# EAGLE board Versie 2 (EAGLE 7.3.0)
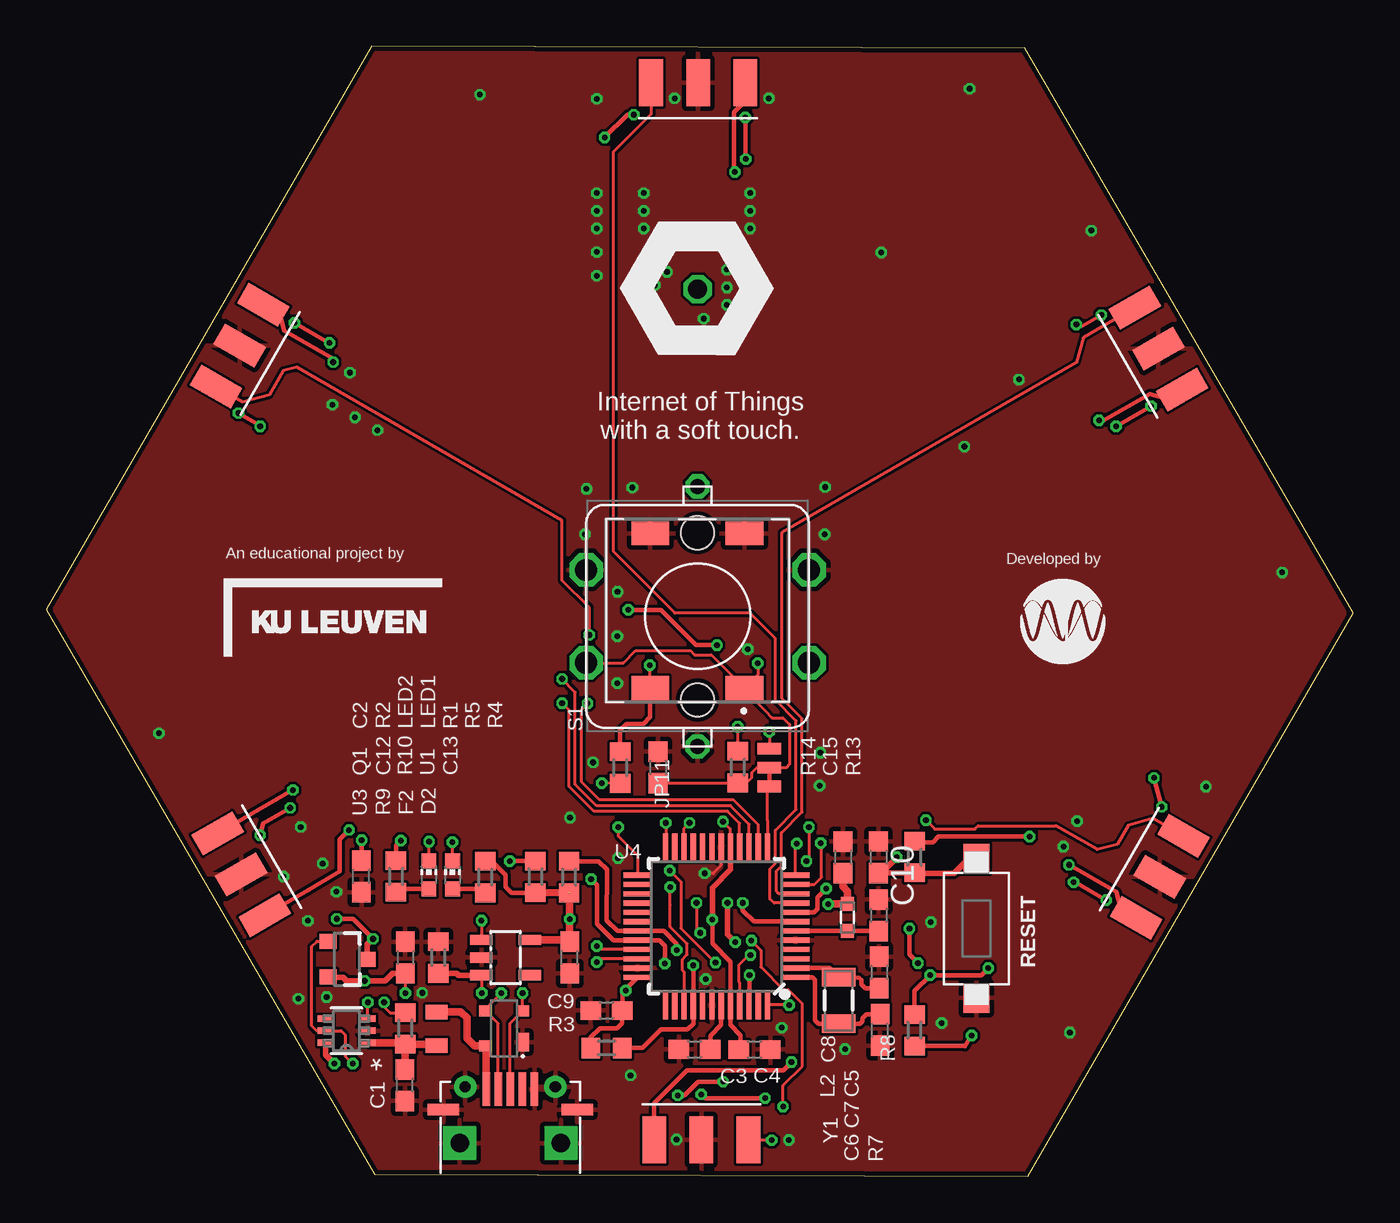
[diagram p0: board, top side]
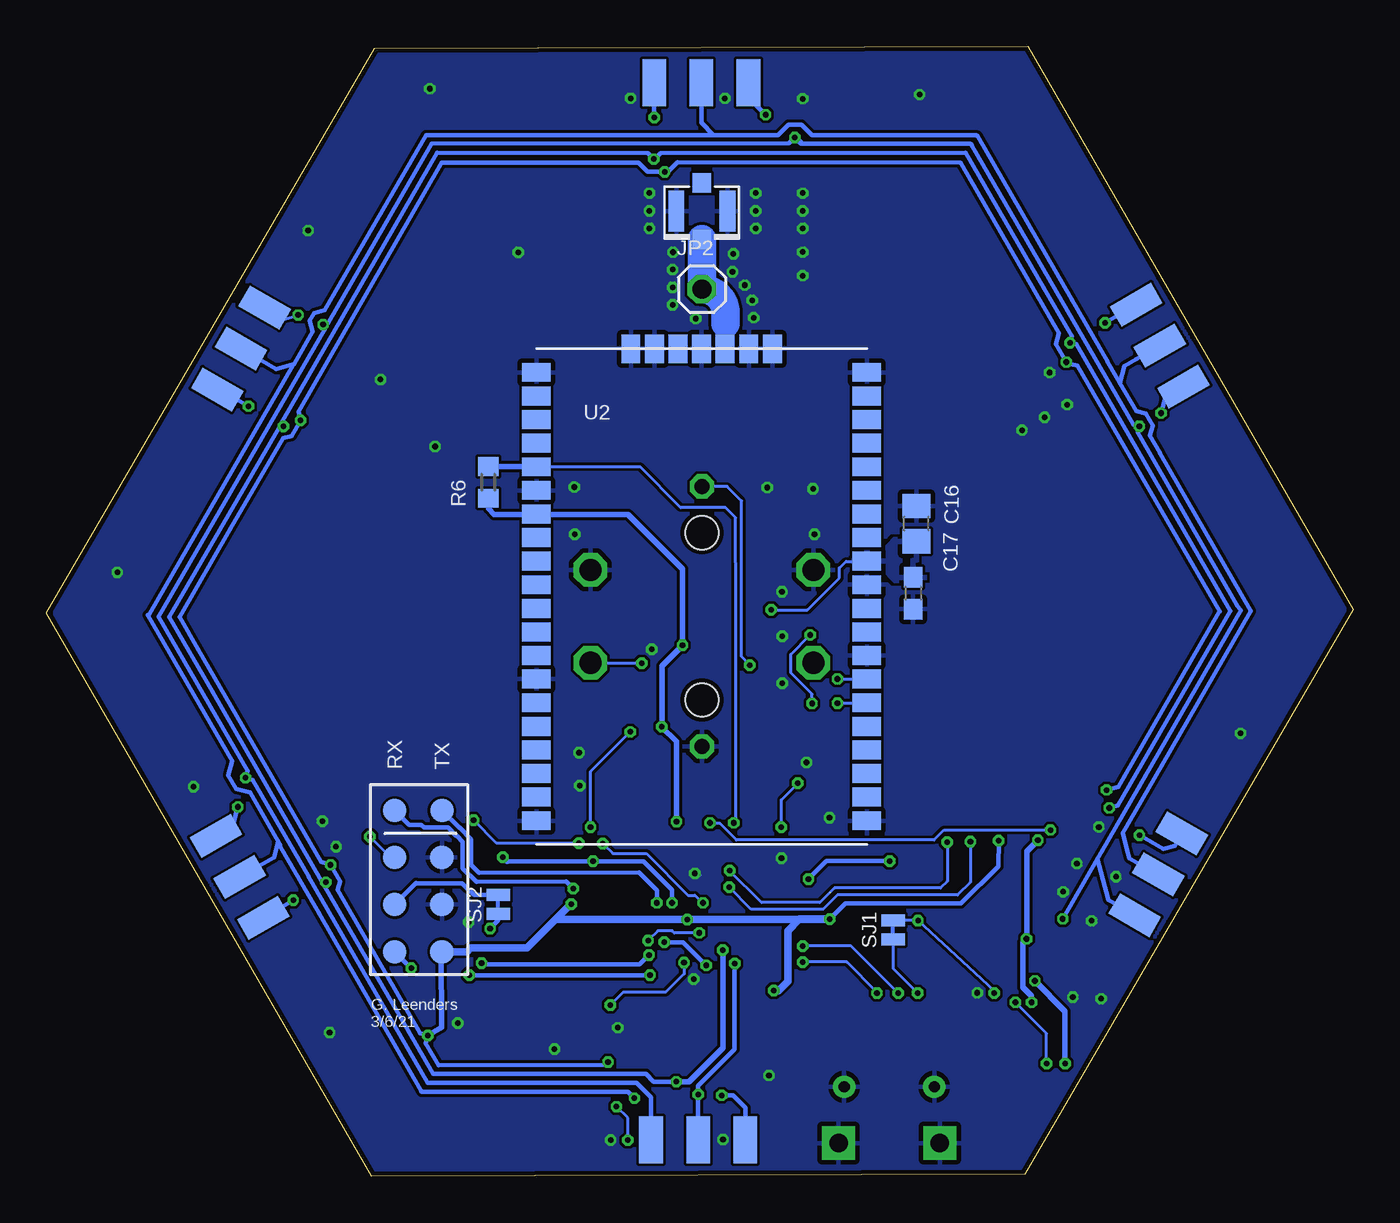
[diagram p1: board, bottom side, seen from below]

Size 70.33 x 60.81 mm. Coordinates in mm from the lower left corner, seen from the top.
Outline: 0,30.5 17.66,0.09 52.83,0 70.33,30.31 52.66,60.72 17.5,60.81 0,30.5
Copper layers (1*16): Top 0.035mm / dielectric 1.5mm / Bottom 0.035mm
Design rules "SeeedStudio_2layer_DRU_no_angle_20140221": minimum track width 6mil, minimum drill 12mil, track to track 6mil, track to pad 6mil, pad to pad 6mil, via to via 6mil, smd to smd 0mil, copper to edge 10mil, drill to drill 10mil, minimum pad ring 10mil, minimum via ring 6mil, stop-mask expansion 2mil, vias tented up to drill 100mil, thermal gap 10mil

## Footprints (pad centres in the part's own frame; a part is rotated, then mirrored left to right if it is on the bottom)
C0603 = smd 1.1 x 1: 1 -0.85,0; 2 0.85,0
C0805 = smd 1.3 x 1.5: 1 -0.95,0; 2 0.95,0
SOT143B = smd 1 x 0.7: 1 -0.75,-1 | smd 0.6 x 0.7: 2 0.95,-1; 3 0.95,1; 4 -0.95,1
0805 = smd 0.8 x 1.2: 1 -0.9,0; 2 0.9,0
U.FL = smd 2.2 x 0.85: P$1 0,1.375; P$2 0,-1.375 | smd 1.05 x 1: P$3 1.525,0; P$4 -1.525,0
1X01 = drill 1.016 octagon: 1 0,0
2X03 = smd 1.27 x 2.54: 1 -2.54,1.905; 2 0,1.905; 3 2.54,1.905 | smd 1.27 x 2.54 bottom: 4 -2.54,1.905; 5 0,1.905; 6 2.54,1.905
SMT-JUMPER_3_1-NC_TRACE_SILK = smd 0.635 x 1.27: 1 -1.016,0; 2 0,0; 3 1.016,0
WE-CBA_0603(W=2.2) = smd 0.75 x 0.7: 1 -0.725,0; 2 0.725,0
CHIP-LED0603 = smd 0.8 x 0.8: A 0,-0.75; C 0,0.75
SOT23-3 = smd 0.8 x 0.9: 1 -0.95,-1; 2 0.95,-1; 3 0,1.1
R0603 = smd 1 x 1.1: 1 -0.85,0; 2 0.85,0
KSS-2EG4430 = smd 1.6 x 1.4: 1 -3.75,0; 2 3.75,0
30062101 = smd 2.025 x 1.275: 1 2.537,-4.162; 2 -2.538,4.162; 3 -2.538,-4.162; 4 2.537,4.162
PAD-JUMPER-2-NC_BY_TRACE_NO_SILK = smd 0.635 x 1.27: 1 -0.508,0; 2 0.508,0
B1,27 = smd 1.27 x 1.27: TP 0,0
SOT25 = smd 0.55 x 1.2: 1 -0.95,-1.3; 2 0,-1.3; 3 0.95,-1.3; 4 0.95,1.3; 5 -0.95,1.3
RN2483 = smd 1.524 x 1.016: GND 17.78,1.27; GND1 17.78,10.16; GND2 17.78,13.97; GND3 17.78,25.4; GND9 0,25.4; GND10 0,19.05; GND11 0,8.89; GND12 0,1.27; GPIO0 0,16.51; GPIO1 0,15.24; GPIO2 0,13.97; GPIO3 0,12.7; GPIO4 0,11.43; GPIO5 0,10.16; GPIO6 0,6.35; GPIO7 0,5.08; GPIO8 0,3.81; GPIO9 0,2.54; GPIO10 17.78,17.78; GPIO11 17.78,16.51; GPIO12 17.78,12.7; GPIO13 17.78,11.43; P$1 0,21.59; P$2 0,22.86; P$3 0,24.13; P$4 17.78,24.13; P$5 17.78,22.86; P$6 17.78,21.59; P$7 17.78,20.32; P$8 17.78,19.05; P$9 17.78,6.35; P$10 17.78,5.08; P$11 0,7.62; RESET° 0,20.32; UART_CTS 17.78,3.81; UART_RTS 17.78,2.54; UART_RX 17.78,8.89; UART_TX 17.78,7.62; VDD 17.78,15.24; VDD2 0,17.78 | smd 1.016 x 1.524: GND4 12.7,26.67; GND5 11.43,26.67; GND6 8.89,26.67; GND7 6.35,26.67; GND8 5.08,26.67; RFH 10.16,26.67; RFL 7.62,26.67
DCK6_TEX = smd 0.851 x 0.356: 1 -1.137,0.65; 2 -1.137,0; 3 -1.137,-0.65; 4 1.137,-0.65; 5 1.137,0; 6 1.137,0.65
TQFP-48 = smd 1.5 x 0.28: 1 -4.25,2.75; 2 -4.25,2.25; 3 -4.25,1.75; 4 -4.25,1.25; 5 -4.25,0.75; 6 -4.25,0.25; 7 -4.25,-0.25; 8 -4.25,-0.75; 9 -4.25,-1.25; 10 -4.25,-1.75; 11 -4.25,-2.25; 12 -4.25,-2.75; 25 4.25,-2.75; 26 4.25,-2.25; 27 4.25,-1.75; 28 4.25,-1.25; 29 4.25,-0.75; 30 4.25,-0.25; 31 4.25,0.25; 32 4.25,0.75; 33 4.25,1.25; 34 4.25,1.75; 35 4.25,2.25; 36 4.25,2.75 | smd 0.28 x 1.5: 13 -2.75,-4.25; 14 -2.25,-4.25; 15 -1.75,-4.25; 16 -1.25,-4.25; 17 -0.75,-4.25; 18 -0.25,-4.25; 19 0.25,-4.25; 20 0.75,-4.25; 21 1.25,-4.25; 22 1.75,-4.25; 23 2.25,-4.25; 24 2.75,-4.25; 37 2.75,4.25; 38 2.25,4.25; 39 1.75,4.25; 40 1.25,4.25; 41 0.75,4.25; 42 0.25,4.25; 43 -0.25,4.25; 44 -0.75,4.25; 45 -1.25,4.25; 46 -1.75,4.25; 47 -2.25,4.25; 48 -2.75,4.25
LS1201 = drill 1.2 octagon: C1 0,5; C2 12,5; C3 0,0; C4 12,0 | drill 0.8 octagon: L1 6,9.5; L2 6,-4.5 | hole 1.8: 6,-2; 6,7
FCI-10103594-0001LF = smd 0.4 x 1.8: 1 -1.3,4.6; 2 -0.65,4.6; 3 0,4.6; 4 0.65,4.6; 5@1 1.3,4.6 | drill 0.6 pad 1.2: 5@2 -2.425,4.73; 5@3 2.425,4.73 | drill 1 pad 1.778 square: 5@4 -2.725,1.7; 5@5 2.725,1.7 | smd 1.7 x 0.635: 5@6 -3.6,3.5; 5@7 3.6,3.5
CRYSTAL-SMD-3.2X1.5MM = smd 1 x 1.8: P$1 -1.25,0; P$2 1.25,0

## Placement (x,y rotation side)
C1  100n  [C0603]  19.3,4.9 90 top
C2  100n  [C0603]  16.95,16.14 90 top
C3  1u  [C0603]  34.88,6.83 0 top
C4  100n  [C0603]  38.11,6.82 180 top
C5  100n  [C0603]  44.79,14.04 270 top
C6  15p  [C0603]  44.87,7.87 90 top
C7  15p  [C0603]  44.82,10.97 270 top
C8  100n  [C0603]  42.87,17.17 270 top
C9  100n  [C0603]  30.15,8.92 0 top
C10  100n  [C0603]  44.78,17.17 270 top
C12  100n  [C0603]  19.31,11.77 270 top
C13  100n  [C0603]  28.17,11.77 90 top
C15  100n  [C0603]  32.92,22.01 270 top
C16  10u  [C0805]  23.51,35.12 90 bottom
C17  100n  [C0603]  23.68,31.38 270 bottom
D2  PRTR5V0U2X,215  [SOT143B]  24.64,7.96 90 top
F2  PPTC_6V500MA  [0805]  21,7.93 270 top
J1  U.FL  [U.FL]  35.05,51.95 270 bottom
JP2  [1X01]  35.05,47.75 0 bottom
JP3  [2X03]  35.08,60.76 180 top
JP4  [2X03]  61.51,45.5 120 top
JP5  [2X03]  61.58,15.16 60 top
JP6  [2X03]  35.25,0.05 0 top
JP7  [2X03]  8.83,15.3 300 top
JP8  [2X03]  8.75,45.66 240 top
JP11  [SMT-JUMPER_3_1-NC_TRACE_SILK]  38.91,21.99 270 top
L2  [WE-CBA_0603(W=2.2)]  43.13,13.93 90 top
LED1  [CHIP-LED0603]  21.85,16.21 0 top
LED2  [CHIP-LED0603]  20.58,16.21 0 top
Q1  [SOT23-3]  16.16,11.68 270 top
R1  470  [R0603]  23.62,16.1 90 top
R2  470  [R0603]  18.82,16.14 90 top
R3  10k  [R0603]  30.15,6.9 180 top
R4  10k  [R0603]  28.13,16.1 270 top
R5  10k  [R0603]  26.32,16.11 270 top
R6  10k  [R0603]  46.54,37.35 270 bottom
R7  10k  [R0603]  46.72,7.86 270 top
R8  330  [R0603]  46.72,17.18 90 top
R9  10k  [R0603]  19.31,7.96 90 top
R10  10k  [R0603]  21.09,11.77 270 top
R13  10k  [R0603]  37.21,22.02 90 top
R14  10k  [R0603]  30.88,21.99 90 top
RESET  KSS-2EG4430  [KSS-2EG4430]  50.05,13.34 270 top
S1  3006.2100  [30062101]  35.04,30.44 0 top
SJ1  [PAD-JUMPER-2-NC_BY_TRACE_NO_SILK]  24.76,13.25 90 bottom
SJ2  [PAD-JUMPER-2-NC_BY_TRACE_NO_SILK]  46.01,14.63 90 bottom
TP1  TPB1,27  [B1,27]  49.05,12.09 0 bottom
TP2  TPB1,27  [B1,27]  49.05,14.63 0 bottom
TP3  TPB1,27  [B1,27]  49.05,17.17 0 bottom
TP4  TPB1,27  [B1,27]  51.59,12.09 0 bottom
TP5  TPB1,27  [B1,27]  51.59,14.63 0 bottom
TP6  TPB1,27  [B1,27]  51.59,17.17 0 bottom
TP7  TPB1,27  [B1,27]  49.04,19.69 0 bottom
TP8  TPB1,27  [B1,27]  51.58,19.69 0 bottom
U1  LP2985AIM5-3.3  [SOT25]  24.71,11.77 270 top
U2  RN2483  [RN2483]  43.96,17.87 0 bottom
U3  LM66100DCKR  [DCK6_TEX]  16.15,7.83 180 top
U4  ATSAMD21G-A  [TQFP-48]  36.07,13.45 180 top
U$1  LS1201  [LS1201]  29.04,27.63 0 top
USB1  USB-RECEPTABLE  [FCI-10103594-0001LF]  24.97,0.08 0 top
Y1  32.768kHz  [CRYSTAL-SMD-3.2X1.5MM]  42.64,9.46 270 top

## Library data of the parts
C1-C10 C12 C13 C15-C17 R1-R10 R13 R14 = rcl
D2 = PRTR5V0U2X_215; AVAILABILITY: Good; DESCRIPTION: Clamp Ipp Tvs Diode Surface Mount SOT-143B; MF: Nexperia USA Inc.; MP: PRTR5V0U2X,215; PACKAGE: None; PRICE: None; PURCHASE-URL: https://pricing.snapeda.com/search/part/PRTR5V0U2X,215/?ref=eda
F2 = SparkFun-Fuses
J1 = SparkFun-Connectors; PROD_ID: CONN-09193
JP2 = pinhead
JP3-JP8 = pinhead_edge
JP11 = SparkFun-Jumpers
L2 = EagleLibrary_Wuerth_Elektronik_eiSos_rev16a
LED1 LED2 = led
Q1 = SparkFun-DiscreteSemi; PROD_ID: TRANS-11308
RESET = buttons
S1 = SamacSys_Parts; DESCRIPTION: Tactile Switches TACTILE; HEIGHT: 4.15mm; MANUFACTURER_NAME: MARQUARDT; MANUFACTURER_PART_NUMBER: 3006.2100; MOUSER_PART_NUMBER: 979-3006.2100
SJ1 SJ2 = SparkFun-Passives
TP1-TP8 = testpad
U1 = LP2985
U2 = RN2483
U3 = LM66100; BUILT_BY: EMA_Jessica; COPYRIGHT: Copyright (C) 2018 Accelerated Designs. All rights reserved; MANUFACTURER_PART_NUMBER: LM66100DCKR; SOURCELIBRARY: TI_2019-12-20; VENDOR: Texas Instruments
U4 = samd21-temp; PROD_ID: IC-13064
U$1 = button
USB1 = daspilker
Y1 = samd21-temp; PROD_ID: XTAL-13062

## Nets
+3V3: C4.2 C8.2 C9.2 C13.2 C16.1 C17.1 JP3.1 JP4.1 JP5.1 JP6.1 JP7.1 JP8.1 L2.2 R1.2 R2.2 R3.2 R4.2 R5.2 R6.2 R7.2 R13.2 TP1.TP U1.5 U2.VDD U2.VDD2 U4.17 U4.36 U4.44
BUTTON: JP11.3 U4.13
DEBUGLED: R14.1 U4.25
DEBUGRX: TP8.TP U4.8
DEBUGTX: TP7.TP U4.7
EXINT4: JP3.3 U4.9
EXINT5: JP4.3 U4.10
EXINT6: JP5.3 U4.11
EXINT7: JP6.3 U4.12
EXINT8: JP7.3 U4.22
EXINT9: JP8.3 U4.14
GND: C1.1 C2.1 C3.1 C4.1 C5.1 C6.1 C7.1 C8.1 C9.1 C10.1 C12.1 C13.1 C15.1 C16.2 C17.2 D2.1 J1.P$1 J1.P$2 JP3.2 JP4.2 JP5.2 JP6.2 JP7.2 JP8.2 R10.1 RESET.2 S1.2 S1.4 TP2.TP TP3.TP U1.2 U2.GND U2.GND1 U2.GND2 U2.GND3 U2.GND4 U2.GND5 U2.GND6 U2.GND7 U2.GND8 U2.GND9 U2.GND10 U2.GND11 U2.GND12 U3.2 U4.5 U4.18 U4.35 U4.42 U$1.C1 U$1.C2 U$1.L2 USB1.5@1 USB1.5@2 USB1.5@3 USB1.5@4 USB1.5@5 USB1.5@6 USB1.5@7
N$1: LED1.A R1.1
N$2: LED2.A R2.1
N$3: SJ2.2 TP5.TP
N$5: C6.2 U4.1 Y1.P$2
N$6: C7.2 U4.2 Y1.P$1
N$7: C5.2 L2.1 U4.6
N$8: U2.UART_CTS
N$9: U2.UART_RTS
N$10: J1.P$3 JP2.1 U2.RFH
N$14: Q1.1 R9.2 U3.5
N$15: R8.2 TP6.TP
ONOFF: R10.2 SJ1.1 U1.3
PB22: U4.37
PB23: U4.38
RESETRN2483: R6.1 U2.RESET° U4.24
RXLED: LED1.C U4.48
RXSAMD: U2.UART_TX U4.16
SAMDRESET: C10.2 JP11.1 R3.1 R8.1 RESET.1 U4.40
SCL: JP3.5 JP4.5 JP5.5 JP6.5 JP7.5 JP8.5 R5.1 U4.32
SDA: JP3.4 JP4.4 JP5.4 JP6.4 JP7.4 JP8.4 R4.1 U4.31
SPI_MOSI: U4.19
SPI_SCK: U4.20
SWCLK: SJ2.1 U4.45
SWDIO: R7.1 TP4.TP U4.46
TACTILE_BUTTON: C15.2 JP11.2 R13.1 S1.1 U$1.C3 U$1.C4
TACTILE_LED: R14.2 S1.3 U$1.L1
TARGET_USB_N: D2.3 U4.33 USB1.2
TARGET_USB_P: D2.2 U4.34 USB1.3
TXLED: LED2.C U4.39
TXSAMD: U2.UART_RX U4.15
USB_HOST_EN: U4.41
VBAT: C2.2 JP3.6 JP4.6 JP5.6 JP6.6 JP7.6 JP8.6 Q1.3 U3.3
VDDCORE: C3.2 U4.43
VIN: C12.2 Q1.2 SJ1.2 U1.1 U3.6
VINUSB: D2.4 F2.1 USB1.1
VUSB: C1.2 F2.2 R9.1 U3.1

## Tracks (layer width: path | path; a pad name or v marks a point on that pad's centre or on a via)
+3V3  (via drill 0.3)  (1 unrouted)
  Top 0.152: R13.2 v37.21,24.19 v37.2,24.2 | U4.17 36.8,17.72 36.8,18.7 v36.41,19.08
  Top 0.254: 37.28,6.84 C4.2 37.36,6.92 37.36,7.59 36.82,8.14 U4.44 36.83,9.21 36.83,11.54 35.84,12.53 v35.84,13.81 | 31,9.88 C9.2 30.99,8.91 30.99,8.23 30.72,7.96 29.79,7.96 29.3,7.46 R3.2 | 31,9.88 U4.36 | 31,9.88 31.08,9.88 v31.19,9.99 | 36.83,17.69 U4.17 | R1.2 23.98,16.95 24.71,16.21 24.71,15.58 25.03,15.26 R5.2 | R2.2 18.82,17.8 v19.07,18.06 | R7.2 49.41,7.01 49.45,7 v49.79,7.57 49.79,7.58 | JP6.1 32.71,3.94 34.47,5.7 39.66,5.7 v40.1,6.14 | v13.26,20.79 JP7.1 | JP8.1 12.57,46.38 12.8,45.51 15.37,44.03 v15.43,43.82 | JP3.1 37.62,57.88 37,57.26 37,54.11 v37.06,54.06 | v31.32,30.48 33.08,30.48 34.97,28.59 v36.08,28.59 v36.09,28.58 | JP4.1 60.29,41.86 59.38,42.11 56.83,40.63 v56.65,40.68 | JP5.1 57.84,14.38 57.59,15.3 55.06,16.76 v55.03,16.76
  Top 0.305: 36.83,17.69 36.83,16.52 35.84,15.53 v35.84,13.81
  Top 0.406: U1.5 28.07,12.72 C13.2 v28.17,13.84 28.15,13.85 28.15,15.22 R4.2 | 28.14,15.27 R5.2 | v42.09,14.65 L2.2 43.13,15.34 42.87,15.59 C8.2
  Bottom 0.152: v31.32,30.48 29.37,30.48 27.65,32.2 27.65,32.74 27.29,33.09 26.19,33.09 U2.VDD
  Bottom 0.254: v15.43,43.82 15.43,43.78 14.84,43.62 7.18,30.4 7.19,30.4 12.31,21.53 12.64,20.96 v13.26,20.79 | v40.1,6.14 40.24,6 49.23,5.98 49.91,7.15 v49.79,7.57 50.21,7.68 50.36,7.94 54.66,15.42 54.53,15.88 v55.03,16.76 55.08,16.79 55.55,16.91 62.15,28.35 63.16,30.1 63.16,30.11 60.43,34.83 57.6,39.73 57.13,39.84 v56.65,40.68 56.64,40.7 56.76,41.16 49.17,54.37 49.05,54.56 38.47,54.56 37.97,54.06 v37.06,54.06 36.88,54.06 36.37,54.57 21.13,54.56 21.11,54.53 15.82,45.38 15.98,44.78 v15.43,43.82 | v19.07,18.06 19.1,16.68 21.1,14.68 27.33,14.68 v28.17,13.84 | 49.08,12.08 TP1.TP 49.06,12.07 | v15.43,43.82
  Bottom 0.305: 26.26,33.02 U2.VDD | R6.2 46.54,35.92 46.24,35.63 43.98,35.63 U2.VDD2 43.93,35.63 39.03,35.63 36.09,32.69 v36.09,28.58 37.2,27.47 v37.2,24.2 | 23.68,34 C16.1 | 49.08,12.08 49.07,8 v49.79,7.57 | v36.41,19.08 36.41,23.4 v37.21,24.19
  Bottom 0.406: v31.19,9.99 30.94,9.99 30.43,10.5 30.43,13.2 29.79,13.84 v28.17,13.84 28.19,13.81 v35.84,13.81 42.94,13.81 | v42.09,14.65 42.1,14.65 42.94,13.81 | 42.94,13.81 44.12,12.63 | 49.05,12.11 TP1.TP 47.69,12.08 47.49,12.28 44.47,12.28 44.12,12.63 | 44.12,12.63
  pour Bottom: 24.65,32.07 23.07,32.07 23.07,34.61 24.34,34.61 25.29,33.66 26.88,33.66 26.88,32.7 25.29,32.7
BUTTON
  Top 0.152: U4.13 38.8,19.14 38.8,20.87 JP11.3
DEBUGLED  (via drill 0.3)
  Top 0.152: R14.1 30.78,21.17 v29.89,21.15 | v30.78,18.79 30.78,18.3 31.82,17.26 U4.25
  Bottom 0.152: v30.78,18.79 30.78,20.26 v29.89,21.15
DEBUGRX  (via drill 0.3)
  Top 0.254: U4.8 41.31,14.2 41.49,14.39 41.49,15 v41.98,15.48
  Bottom 0.254: v41.98,15.48 42.36,15.86 47.18,15.84 47.92,16.58 47.92,18 48.23,18.3 48.28,18.33 48.71,18.76 50,18.76 50.16,18.91 50.8,18.91 TP8.TP
DEBUGTX  (via drill 0.3)
  Top 0.254: U4.7 38.08,13.71 37.47,14.32 v37.47,14.71
  Bottom 0.254: TP7.TP 48.12,18.76 48.07,18.73 47.46,18.13 47.46,16.75 47.03,16.32 38.42,16.35 37.47,15.39 v37.47,14.71
EXINT4
  Top 0.152: U4.9 39.17,14.7 38.94,14.92 38.94,16.54 39.23,16.83 39.23,18.62 40.35,19.73 40.35,24.51 39.23,25.62 39.23,28.95 37.87,30.31 33.83,30.31 30.53,33.61 30.53,55.15 32.56,57.19 32.56,58.84 JP3.3
EXINT5
  Top 0.152: U4.10 39.41,15.2 39.29,15.33 39.29,16.42 39.56,16.7 39.56,18.49 40.68,19.6 40.68,24.63 39.59,25.73 39.59,34.65 39.59,34.64 39.58,34.64 55.44,43.8 55.8,45.14 JP4.3
EXINT6  (via drill 0.3)
  Top 0.152: U4.11 41.33,15.7 41.72,16.09 41.72,17.87 v41.67,17.92 | v47.34,19.17 47.82,18.68 49.98,18.68 50.16,18.86 54.31,18.86 54.33,18.87 56.56,17.58 57.64,17.87 58.23,18.89 59.56,19.25 JP5.3
  Bottom 0.152: v41.67,17.92 46.09,17.92 v47.34,19.17
EXINT7  (via drill 0.3)
  Top 0.152: U4.12 40.32,17.78 v40.38,17.9 | v34.99,14.71 34.99,13.3 v35.2,13.1 | JP6.3 39.02,1.95 v39.04,1.94 | v37.94,12.68 37.94,12.66 38.45,12.15 38.45,11.26 39.67,10.04 39.93,10.04 40.69,9.28 40.69,5.92 39.65,4.88 v39.65,3.74
  Bottom 0.152: v40.38,17.9 39.84,17.36 38.04,17.36 35.81,15.13 35.42,15.13 v34.99,14.71 | v35.2,13.1 36.53,13.1 36.65,13.21 37.41,13.21 v37.94,12.68 | v39.04,1.94 39.04,3.13 v39.65,3.74
EXINT8  (via drill 0.3)
  Top 0.152: U4.22 34.32,18.72 v34.61,19.01
  Top 0.254: JP7.3 14.12,15.42 15.79,16.4 15.79,18.13 v16.29,18.63 15.99,18.33
  Bottom 0.152: v34.61,19.01 34.1,19.01 33.19,18.1 22.55,18.1 22.01,18.63 v16.29,18.63
EXINT9  (via drill 0.3)
  Top 0.152: U4.14 38.32,18.92 36.97,20.26 29.76,20.26 28.79,21.22 28.79,25.12 v29.12,25.45 | JP8.3 10.56,41.68 11.98,42.06 12.73,43.35 13.49,43.56 27.74,35.32 27.75,35.23 27.75,32.08 29.22,30.6 v29.22,29.13
  Bottom 0.152: v29.12,25.45 29.12,25.95 30.26,27.1 30.26,28.09 v29.22,29.13
GND  (via drill 0.3)
  Top 0.152: U4.18 36.32,16.73 35.88,16.3 v35.42,16.3
  Bottom 0.152: v35.42,16.3 35.23,16.3 35.13,16.19
  other vias: 6.05,23.84 23.34,58.22 15.08,9.64 20.22,9.87 13.56,9.55 49.69,58.54 66.52,32.5 55.09,7.74 35.49,10.61 39.58,7.99 31.44,5.42 30.76,17.11 28.19,19.3 29.42,22.27 30.72,26.53 37.75,28.36 41.61,21.02 56.24,50.9 52.35,42.88 44.93,49.73 32.26,46.21 32.33,47.15 32.74,47.96 33.4,48.67 35.38,46.16 33.35,49.64 36.6,49.74 36.63,48.8 36.63,47.85 36.63,46.9 37.87,51.01 37.87,51.96 37.87,52.92 32.16,52.92 32.16,51.96 32.16,51.01 42.98,6.85 39.96,1.94 33.91,1.97 13.68,18.8 15.6,15.31 12.76,16.13 14.08,13.75 16.33,43.25 15.39,41.53 16.61,40.85 17.82,40.15 29.62,52.92 29.62,51.96 29.62,51.01 29.62,49.74 29.62,48.47 29.62,58 33.81,58.02 38.89,58.02 54.74,17.74 55.47,19.11 62.41,20.97 48.19,8.24 47.6,13.68 14.87,16.83 30.72,29.07 30.74,31.45 28.99,34.55 31.53,37.07 29.07,36.99 41.89,34.55 41.92,37.09 49.41,39.28 41.66,22.79
  pour Top (rank 6): 95.59,46.2 24.1,87.48 -21.62,8.29 49.87,-32.99
  pour Bottom (rank 6): 36.67,-25.37 -21.62,8.29 24.1,87.48 95.59,46.2 49.87,-32.99
N$1
  Top 0.254: LED1.A 23.41,15.46 R1.1
N$2
  Top 0.254: LED2.A 19,15.46 R2.1
N$3
  Bottom 0.254: 50.44,15.79 50.44,15.78 | 50.44,15.78 TP5.TP | 50.44,15.78 50.42,15.76 47.95,15.76 47.32,15.14 SJ2.2
N$5
  Top 0.254: C6.2 44.13,8.72 43.91,8.5 43.91,8.33 43.79,8.2 Y1.P$2 41.55,8.2 41.37,8.38 41.37,10.56 41.23,10.7 U4.1
N$6
  Top 0.254: U4.2 42.15,11.2 Y1.P$1 42.66,10.69 43.74,10.69 43.86,10.56 43.86,10.33 44.08,10.12 C7.2
N$7
  Top 0.254: U4.6 42.54,13.2 L2.1 44.2,13.2 C5.2
N$10
  Bottom 1.016: U2.RFH 33.78,44.55 33.78,45.64 33.79,45.9
  Bottom 1.54: J1.P$3 JP2.1 arc90 33.79,46.48 33.79,45.9
N$14  (via drill 0.3)
  Top 0.152: Q1.1 15.15,12.65 14.56,12.65 14.28,12.37 14.28,8.09 14.54,7.83 U3.5 15.86,7.83 16.09,7.6 16.09,6.46 v16.49,6.05 | R9.2 18.5,8.8 18.17,9.13 v18.17,9.36
  Bottom 0.152: v16.49,6.05 16.49,7.68 v18.17,9.36
N$15  (via drill 0.3)
  Top 0.254: R8.2 46.97,17.98 47.72,17.98 48.02,18.28 v52.92,18.28
  Bottom 0.152: TP6.TP 51.81,17.17 v52.92,18.28
  Bottom 0.254: v52.92,18.28 53.01,18.28
ONOFF  (via drill 0.3)
  Top 0.152: v23.44,9.86 23.44,10.79 U1.3
  Top 0.305: R10.2 22.07,10.92 22.17,10.82 U1.3
  Bottom 0.152: SJ1.1 24.76,11.18 v23.44,9.86
RESETRN2483  (via drill 0.3)
  Top 0.152: v33.34,19.01 33.34,17.73 U4.24
  Bottom 0.152: U2.RESET° 38.39,38.19 36.19,35.99 33.77,35.99 33.23,35.45 33.23,33.02 33.23,19.13 v33.34,19.01
  Bottom 0.305: U2.RESET° R6.1
RXLED  (via drill 0.3)
  Top 0.152: LED1.C 21.85,17.97 v21.84,17.98 | U4.48 38.82,9.21 v39.97,9.21 | 33.56,16.44 v33.55,16.44 33.56,16.44 | 33.56,16.44 34.15,15.85 34.15,13.35 v36.01,11.5
  Bottom 0.152: v21.84,17.98 21.84,15.87 22.2,15.52 27.91,15.52 28.7,14.73 31.84,14.73 v33.55,16.44 | v36.01,11.5 36.01,10.89 37,9.9 39.29,9.9 v39.97,9.21
RXSAMD  (via drill 0.3)
  Top 0.152: U4.16 37.32,18.99 36.67,19.64 29.47,19.64 28.13,20.97 28.13,25.08 v27.75,25.47
  Bottom 0.152: v27.75,25.47 26.2,25.47 U2.UART_TX
SAMDRESET  (via drill 0.3)
  Top 0.152: v38.9,23.92 v38.91,23.91 JP11.1 | v41.04,18.79 41.04,17.08 v40.91,16.96
  Top 0.254: R3.1 32.08,6.9 33.07,7.9 34.52,7.9 34.82,8.2 U4.40 v34.82,11.35
  Top 0.305: RESET.1 50.05,17.41 49.98,17.49 49.98,17.42 48.84,16.29 47.35,16.29 47.34,16.3 R8.1 44.93,16.33 v45.77,17.17 | v36.66,14.71 36.66,13.01 v37.07,12.6
  Top 0.406: C10.2 44.79,16.33 44.93,16.33
  Bottom 0.152: v41.04,18.79 41.04,21.78 v38.9,23.92
  Bottom 0.254: v34.82,11.35 36.07,12.59 36.71,12.59 v37.07,12.6 | 45.55,16.96 41.44,16.96 v40.91,16.96 38.19,16.96 36.66,15.42 v36.66,14.71
  Bottom 0.305: 45.55,16.96 v45.77,17.17
SCL  (via drill 0.3)
  Top 0.254: R5.1 v24.94,16.96 | v29.31,16 29.64,15.67 29.64,13.58 30.53,12.7 U4.32 | U4.32 | U4.32 32.99,12.7 33.28,12.4 v33.28,11.45 | v38.68,4.2 35.45,4.2 v35.25,4.4
  Bottom 0.254: JP8.5 11.65,43.98 12.31,43.6 12.56,42.68 | JP3.5 35.08,57.17 35.08,56.71 34.41,56.04 | 59.92,16.11 JP5.5 59.92,16.11 58.08,17.16 57.85,18.03 | 57.02,43.71 57,43.71 56,45.45 56.16,46.05 55.93,46.45 55.34,46.61 49.88,56.04 34.41,56.04 | JP4.5 59.85,44.55 57.95,43.46 57.02,43.71 | 57.85,18.03 59.37,20.65 60.12,20.85 60.54,21.58 60.34,22.34 64.89,30.21 64.79,30.24 57.02,43.71 | 57.85,18.03 57.74,17.83 57.76,17.76 55.66,14.13 50.15,4.59 50.13,4.54 39.03,4.54 v38.68,4.2 | JP6.5 | 12.56,42.68 11.68,41.18 11.16,41.04 10.79,40.4 10.93,39.86 10.41,38.95 10.41,38.93 5.5,30.43 10.3,22.1 12.4,18.47 12.16,17.59 | 12.56,42.68 13.24,43.85 13.23,43.87 15.14,47.17 20.23,56 20.26,56.01 20.29,56.04 29.13,56.04 29.69,56.6 30.4,56.6 30.96,56.04 34.41,56.04 | 12.26,17.95 12.16,17.59 | 12.16,17.59 12.04,17.12 10.52,16.24 JP7.5 | v24.94,16.96 28.34,16.96 v29.31,16 | v33.28,11.45 33.28,6.83 35.25,4.86 v35.25,4.4 JP6.5 | JP6.5
SDA  (via drill 0.3)
  Top 0.254: R4.1 29.73,16.95 30.17,16.51 30.15,13.76 30.73,13.2 U4.31 33.23,13.2 33.92,12.51 v33.92,12.16 | v33.98,4.35 34.34,4.35 35.07,5.09 v36.42,5.09 | v13.12,19.82 11.66,18.98 v11.5,18.36 | v13.34,45.94 15.22,44.85 v15.24,44.86 | v37.61,56.98 37.61,54.77 v37.64,54.75 | v59.46,41.45 v57.57,40.36 | v57.04,14.86 55.35,15.84 v55.29,15.82
  Bottom 0.254: 63.72,30.11 57.81,40.29 v57.57,40.36 57.64,40.61 49.31,55.09 37.96,55.07 v37.64,54.75 37.61,54.75 37.28,55.08 20.86,55.09 20.82,55.06 16.64,47.81 | 63.72,30.11 63.72,30.1 | 63.72,30.11 61.39,26.06 55.51,15.88 v55.29,15.82 55.34,15.61 50.83,7.79 49.51,5.51 40.14,5.51 38.06,5.51 37.64,5.09 v36.42,5.09 | 16.64,47.81 16.63,47.81 | 16.64,47.81 15.14,45.22 v15.24,44.86 15.21,44.87 14.9,44.79 6.6,30.42 6.61,30.43 12.66,19.94 v13.12,19.82 | JP6.4 32.71,3.68 33.37,4.35 v33.98,4.35 | v11.5,18.36 10.22,17.62 9.6,17.79 JP7.4 | JP8.4 v13.34,45.94 | JP3.4 v37.62,56.99 v37.61,56.98 | JP4.4 60.2,41.81 60.12,41.83 v59.46,41.45 | JP5.4 57.05,14.84 v57.04,14.86
  Bottom 0.305: v33.92,12.16 33.92,7.32 33.92,6.9 35.74,5.09 v36.42,5.09 | v33.92,12.16
SWCLK  (via drill 0.3)
  Top 0.152: v37.89,11.91 37.82,11.91 37.26,11.35 37.26,10.46 37.31,10.41 U4.45
  Top 0.254: v46.45,13.32 46.45,11.94 v46.91,11.48
  Bottom 0.254: v37.89,11.91 38.4,11.4 46.84,11.4 v46.91,11.48 | 46.42,13.35 v46.45,13.32 46.01,13.76 SJ2.1
SWDIO  (via drill 0.3)
  Top 0.254: v37.84,10.82 37.84,9.23 U4.46 | R7.1 46.72,9.97 v47.57,10.82 50.32,10.82 v50.69,11.19
  Bottom 0.254: v47.57,10.82 v37.84,10.82 | v50.69,11.19 TP4.TP
TACTILE_BUTTON  (via drill 0.3)
  Top 0.152: C15.2 37.2,21.16 R13.1 37.68,21.17 37.96,21.45 37.96,21.73 38.22,21.99 JP11.2 38.9,20.98 38.91,20.98 | JP11.2 39.82,21.99 40,22.16 40,24.32 39.64,24.68 39.06,24.68 38.68,25.06 37.56,26.18 37.56,26.26 | v38.29,27.61 38.29,27 S1.1 35.79,28.06 34.89,28.06 34.66,28.29 31.71,28.29 31.05,27.63 U$1.C3 | JP11.2 | JP11.2
  Top 0.254: 37.56,26.26 S1.1
  Bottom 0.152: U$1.C4 38.32,27.63 v38.29,27.61
TACTILE_LED  (via drill 0.3)
  Top 0.152: S1.3 32.5,27.48 v32.47,27.5
  Top 0.254: 32.43,26.21 S1.3 32.5,24.71 32.14,24.35 31.23,24.35 30.88,24.01 R14.2
  Bottom 0.152: v32.47,27.5 32.47,27.53 32.91,27.96 32.91,36.34 33.69,37.13 U$1.L1 | U$1.L1
TARGET_USB_N  (via drill 0.3)
  Top 0.152: USB1.2 24.32,8.23 D2.3 23.64,9 v24.48,9.85 | U4.33 29.8,12.21 v29.63,12.39
  Bottom 0.152: v24.48,9.85 27.02,12.39 v29.63,12.39
TARGET_USB_P  (via drill 0.3)
  Top 0.152: USB1.3 24.97,8.24 D2.2 25.64,9.84 v25.63,9.85 | U4.34 29.8,11.71 v29.63,11.53
  Bottom 0.152: v29.63,11.53 27.25,11.53 25.63,9.9 v25.63,9.85
TXLED  (via drill 0.3)
  Top 0.152: LED2.C 20.58,17.99 v20.6,18 | U4.39 34.31,10.99 34.21,11.1 34.21,11.65 34.48,11.93 34.48,12.51 33.57,13.43 33.57,14.59 v33.58,15.55
  Bottom 0.152: v20.6,18 20.6,15.82 21.28,15.13 27.76,15.13 28.52,14.37 32.4,14.37 v33.58,15.55
TXSAMD  (via drill 0.3)
  Top 0.152: U4.15 37.82,18.95 36.82,19.94 29.62,19.94 28.46,21.1 28.46,26.05 v27.75,26.76
  Bottom 0.152: v27.75,26.76 U2.UART_RX
VBAT  (via drill 0.3)
  Top 0.152: U3.3 17.29,9.34 v17.31,9.36 | v17.59,12.77 v17.56,12.77 | 17.26,11.69 Q1.3 | v56.78,46.35 55.75,45.76 v55.43,45.84
  Top 0.254: C2.2 16.95,18.12 v16.96,18.08 | v10.33,41.07 11.49,40.4 v11.5,40.37 | v31.62,57.13 31.26,57.13 v30.04,55.92 | v60.03,19.88 v59.61,21.44 | v15.62,13.85 16.51,13.85 v17.59,12.77
  Top 0.305: v17.56,12.77 17.26,12.47 17.26,11.69
  Bottom 0.152: JP4.6 57.51,46.12 v56.78,46.35 | 56.22,16.14 56.22,16.13 56.22,16.12
  Bottom 0.254: 56.22,16.14 59.22,21.33 v59.61,21.44 59.51,21.82 64.27,30.1 64.28,30.12 57.72,41.49 55.36,45.57 v55.43,45.84 55.16,45.91 49.59,55.58 30.35,55.61 v30.04,55.92 | 56.22,16.12 49.82,5.03 38.78,5.03 38.58,5.03 37.79,4.25 JP6.6 | 20.55,55.55 20.5,55.47 | 20.5,55.47 11.83,40.46 v11.5,40.37 11.6,40.02 6.25,30.75 6.04,30.44 11.18,21.55 | 11.51,20.98 11.18,21.55 | 11.18,21.55 13.49,17.55 13.76,17.08 | JP7.6 13.16,14.87 13.76,17.08 | 13.76,17.08 v15.62,13.85 v15.63,13.85 | JP8.6 10.09,41.95 v10.33,41.07 | v30.04,55.92 29.71,55.58 29.64,55.58 | 29.64,55.58 20.61,55.58 20.5,55.47 | JP3.6 32.54,58.06 v31.62,57.13 | v30.04,55.92 29.98,55.92 29.64,55.58 | JP5.6 60.31,18.82 v60.03,19.88
  Bottom 0.305: v17.31,9.36 17.31,9.7 17.76,10.16 17.76,12.59 v17.59,12.77 | v17.56,12.77 17.56,17.48 v16.96,18.08
VDDCORE
  Top 0.254: U4.43 36.32,8.15 35.74,7.57 C3.2
VIN  (via drill 0.3)
  Top 0.152: 15.18,10.71 Q1.2 | C12.2 v19.31,9.85 | v23.42,13.76 U1.1
  Top 0.305: 15.18,10.71 15.96,10.71 16.16,10.51 v17.13,10.51 18.22,10.51 18.63,10.92 C12.2 | U3.6 15.02,6.54 v15.5,6.05
  Bottom 0.152: v19.31,9.85 19.31,9.98 v23.42,13.76 SJ1.2
  Bottom 0.305: v17.13,10.51 15.5,8.89 v15.5,6.05
VINUSB
  Top 0.406: USB1.1 23.67,6.98 D2.4 23.03,7.01 22.63,7.41 22.63,8.52 22.3,8.85 21.02,8.85 F2.1
VUSB
  Top 0.406: U3.1 19.24,7.18 R9.1 | R9.1 20.93,7.11 F2.2 | C1.2 R9.1

## Text on the board
tNames: Internet of Things / with a soft touch. | An educational project by | Developed by
bNames: TX | RX | G. Leenders / 3/6/21